# EAGLE board MineralFire (EAGLE 8.7.0)
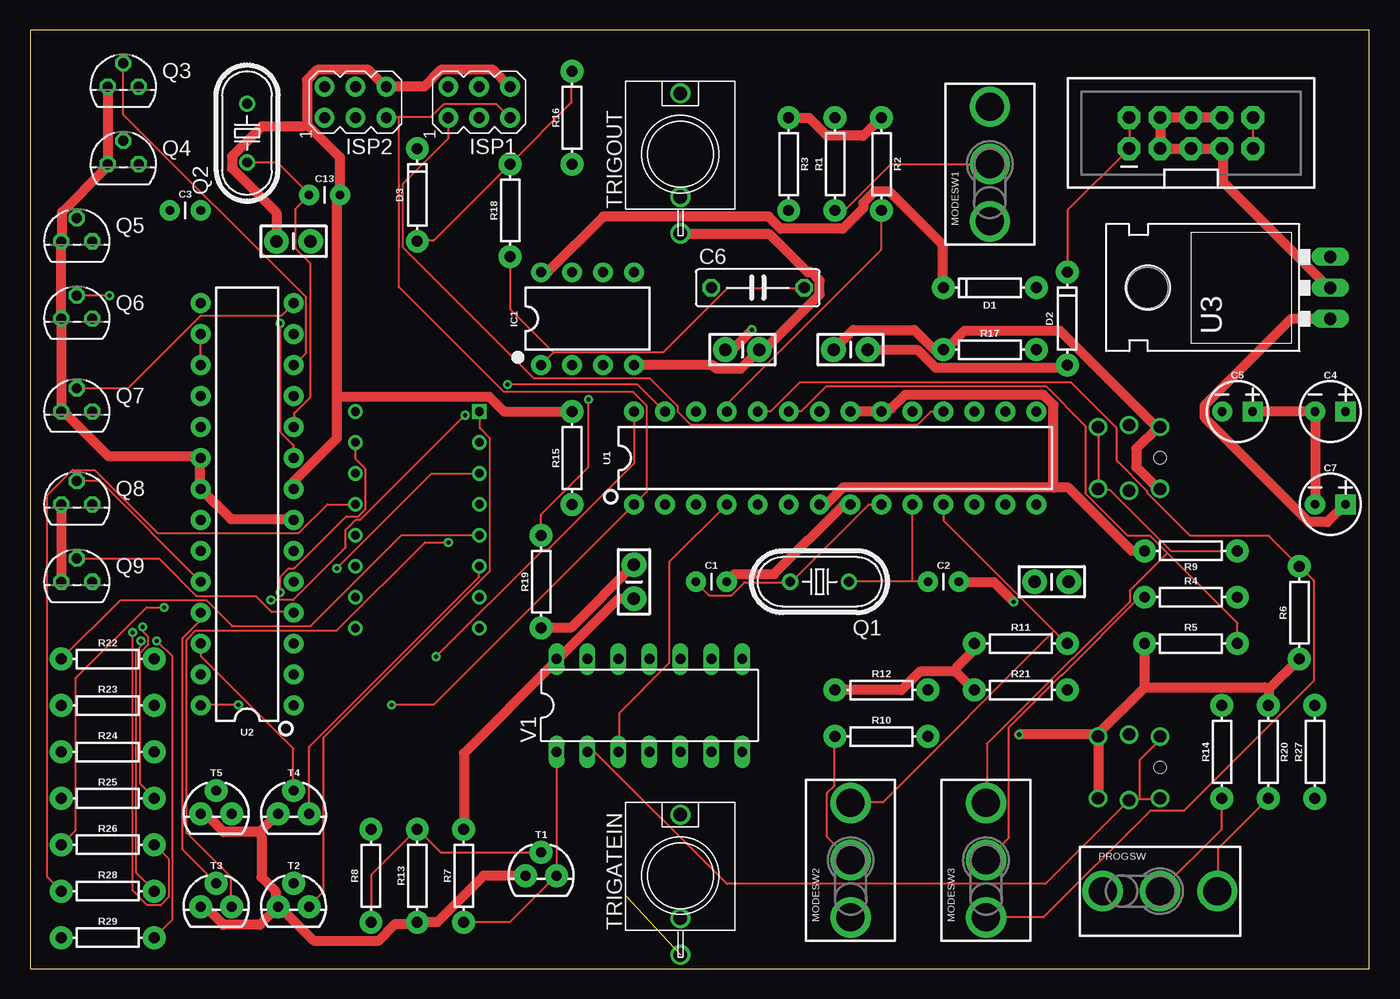
[diagram p0: board, top side]
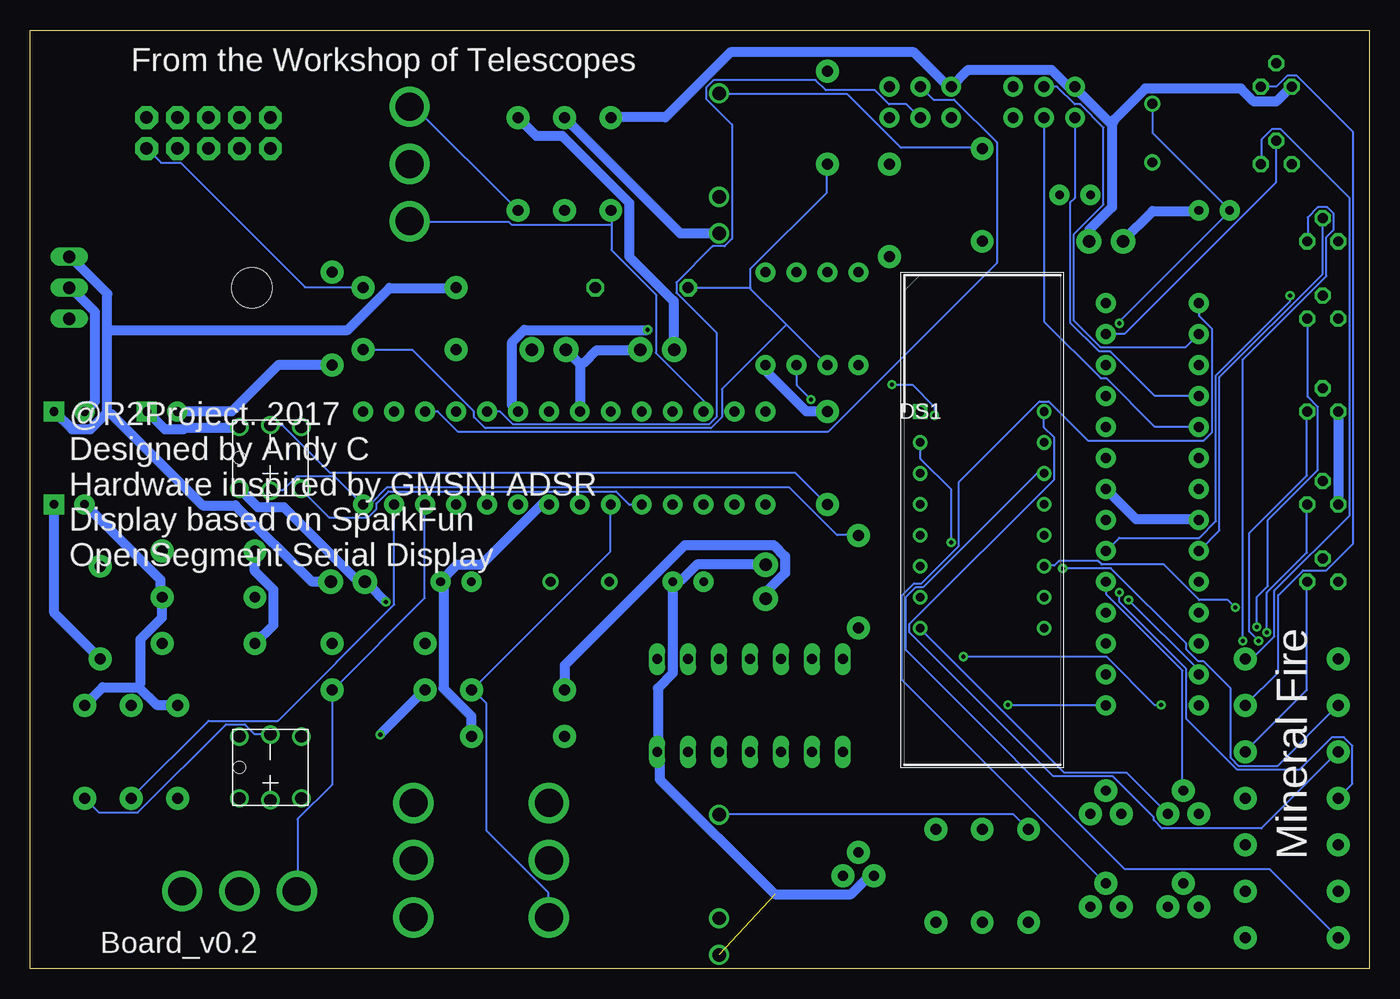
[diagram p1: board, bottom side, seen from below]

Size 109.86 x 77 mm. Coordinates in mm from the lower left corner, seen from the top.
Outline: 0,0 109.86,0 109.86,77 0,77 0,0
Copper layers (1*16): Top 0.035mm / dielectric 1.5mm / Bottom 0.035mm
Design rules "default": minimum track width 6mil, minimum drill 0.35mm, track to track 6mil, track to pad 6mil, pad to pad 6mil, via to via 6mil, smd to smd 6mil, copper to edge 40mil, drill to drill 6mil, minimum pad ring 10mil, minimum via ring 8mil, stop-mask expansion 4mil, vias tented up to drill 0mil, thermal gap 10mil
Net classes: 1 Power: width 0.8 mm

## Footprints (pad centres in the part's own frame; a part is rotated, then mirrored left to right if it is on the bottom)
PB6149L = drill 1: 1 2.54,-2.54; 2 2.54,2.54; 3 -2.54,-2.54; 4 -2.54,2.54; A 0,-2.7; K 0,2.7 | hole 1: -2.54,0
CAP-PTH-2.54 = drill 0.7 pad 1.651: 1 -1.27,0; 2 1.27,0
CPOL-RADIAL-2.5MM-5MM = drill 0.7 pad 1.651 square: 1 1.25,0 | drill 0.7 pad 1.651: 2 -1.25,0
C075-032X103 = drill 0.914 octagon: 1 -3.81,0; 2 3.81,0
CAP-PTH-SMALL-KIT = drill 1.016 pad 2.032: 1 -1.397,0; 2 1.397,0
DIODE-1N4148 = drill 0.9 pad 1.88: A -3.81,0; C 3.81,0
DIPS1016W50P254L4020H700Q16N = drill 0.7 pad 1.1 square: 1 0,0 | drill 0.7 pad 1.1: 2 0,-2.54; 3 0,-5.08; 4 0,-7.62; 5 0,-10.16; 6 0,-12.7; 7 0,-15.24; 8 0,-17.78; 9 10.16,-17.78; 10 10.16,-15.24; 11 10.16,-12.7; 12 10.16,-10.16; 13 10.16,-7.62; 14 10.16,-5.08; 15 10.16,-2.54; 16 10.16,0
DIP08 = drill 0.813 pad 1.626: 1 -3.81,-3.81; 2 -1.27,-3.81; 3 1.27,-3.81; 4 3.81,-3.81; 5 3.81,3.81; 6 1.27,3.81; 7 -1.27,3.81; 8 -3.81,3.81
AVRISP = drill 0.9 pad 1.626: 1 -1.27,2.54; 2 1.27,2.54; 3 -1.27,0; 4 1.27,0; 5 -1.27,-2.54; 6 1.27,-2.54
TOGGLE_ON_OFF_ON = drill 2.3: 1 -4.7,0; 2 0,0; 3 4.7,0
2X5-SHROUDED = drill 1.016 pad 1.88 octagon: 1 -1.27,5.08; 2 1.27,5.08; 3 -1.27,2.54; 4 1.27,2.54; 5 -1.27,0; 6 1.27,0; 7 -1.27,-2.54; 8 1.27,-2.54; 9 -1.27,-5.08; 10 1.27,-5.08
HC49U70 = drill 0.813: 1 -2.413,0; 2 2.413,0
TO92 = drill 0.813 octagon: 1 1.27,0; 2 0,1.905; 3 -1.27,0
AXIAL-0.3 = drill 0.9 pad 1.88: P$1 -3.81,0; P$2 3.81,0
AXIAL-0.3EZ = drill 0.9 pad 1.88: P$1 -3.81,0; P$2 3.81,0
TO-92 = drill 0.813 pad 1.88: 1 -1.27,0; 2 0,1.905; 3 1.27,0
S_JACK = drill 1.1: GND 0,-6.5; NORM 0,-3.5; TIP 0,5
DIP28 = drill 0.813 pad 1.626: 1 -16.51,-3.81; 2 -13.97,-3.81; 3 -11.43,-3.81; 4 -8.89,-3.81; 5 -6.35,-3.81; 6 -3.81,-3.81; 7 -1.27,-3.81; 8 1.27,-3.81; 9 3.81,-3.81; 10 6.35,-3.81; 11 8.89,-3.81; 12 11.43,-3.81; 13 13.97,-3.81; 14 16.51,-3.81; 15 16.51,3.81; 16 13.97,3.81; 17 11.43,3.81; 18 8.89,3.81; 19 6.35,3.81; 20 3.81,3.81; 21 1.27,3.81; 22 -1.27,3.81; 23 -3.81,3.81; 24 -6.35,3.81; 25 -8.89,3.81; 26 -11.43,3.81; 27 -13.97,3.81; 28 -16.51,3.81
TO-220-ALT = drill 1.016 long: GND 0,-3.81; IN -2.54,-3.81; OUT 2.54,-3.81 | hole 3.302: 0,11.176
DIL14 = drill 0.813 long: 1 -7.62,-3.81; 2 -5.08,-3.81; 3 -2.54,-3.81; 4 0,-3.81; 5 2.54,-3.81; 6 5.08,-3.81; 7 7.62,-3.81; 8 7.62,3.81; 9 5.08,3.81; 10 2.54,3.81; 11 0,3.81; 12 -2.54,3.81; 13 -5.08,3.81; 14 -7.62,3.81

## Placement (x,y rotation side)
BUT  PB6149L-5  [PB6149L]  90.17,41.91 0 bottom
BUT1  PB6149L-5  [PB6149L]  90.17,16.51 0 bottom
C1  22pF  [CAP-PTH-2.54]  55.88,31.75 0 top
C2  22pF  [CAP-PTH-2.54]  74.93,31.75 0 top
C3  22pF  [CAP-PTH-2.54]  12.7,62.23 0 top
C4  10uF  [CPOL-RADIAL-2.5MM-5MM]  106.68,45.72 0 top
C5  10uF  [CPOL-RADIAL-2.5MM-5MM]  99.06,45.72 0 top
C6  100pf  [C075-032X103]  59.69,55.88 0 top
C7  10uF  [CPOL-RADIAL-2.5MM-5MM]  106.68,38.1 0 top
C8  0.1uF  [CAP-PTH-SMALL-KIT]  83.82,31.75 180 top
C9  0.1uF  [CAP-PTH-SMALL-KIT]  67.31,50.8 0 top
C10  0.1uF  [CAP-PTH-SMALL-KIT]  58.42,50.8 0 top
C11  0.1uF  [CAP-PTH-SMALL-KIT]  49.53,31.75 90 top
C12  0.1uF  [CAP-PTH-SMALL-KIT]  21.59,59.69 180 top
C13  22pF  [CAP-PTH-2.54]  24.13,63.5 0 top
D1  200mA/100V/1V  [DIODE-1N4148]  78.74,55.88 180 top
D2  200mA/100V/1V  [DIODE-1N4148]  85.09,53.34 90 top
D3  200mA/100V/1V  [DIODE-1N4148]  31.75,63.5 90 top
DS1  TDCG1060M  [DIPS1016W50P254L4020H700Q16N]  36.83,45.72 0 bottom
IC1  LM358  [DIP08]  45.72,53.34 0 top
ISP1  AVRISP-6  [AVRISP]  36.83,71.12 90 top
ISP2  AVRISP-6  [AVRISP]  26.67,71.12 90 top
MODESW1  [TOGGLE_ON_OFF_ON]  78.74,66.04 90 top
MODESW2  [TOGGLE_ON_OFF_ON]  67.31,8.89 90 top
MODESW3  [TOGGLE_ON_OFF_ON]  78.42,8.89 90 top
POWER  M05X2SHD  [2X5-SHROUDED]  95.25,68.58 90 top
PROGSW  [TOGGLE_ON_OFF_ON]  92.71,6.35 0 top
Q1  20MHz  [HC49U70]  64.77,31.75 180 top
Q2  20MHz  [HC49U70]  17.78,68.58 90 top
Q3  2N3906  [TO92]  7.62,72.39 0 top
Q4  2N3906  [TO92]  7.62,66.04 0 top
Q5  2N3906  [TO92]  3.81,59.69 0 top
Q6  2N3906  [TO92]  3.81,53.34 0 top
Q7  2N3906  [TO92]  3.81,45.72 0 top
Q8  2N3906  [TO92]  3.81,38.1 0 top
Q9  2N3906  [TO92]  3.81,31.75 0 top
R1  1k  [AXIAL-0.3]  66.04,66.04 90 top
R2  100k  [AXIAL-0.3]  69.85,66.04 270 top
R3  100k  [AXIAL-0.3]  62.23,66.04 270 top
R4  1k  [AXIAL-0.3]  95.25,30.48 0 top
R5  100k  [AXIAL-0.3]  95.25,26.67 0 top
R6  100k  [AXIAL-0.3]  104.14,29.21 90 top
R7  10k  [AXIAL-0.3]  35.56,7.62 90 top
R8  100k  [AXIAL-0.3]  27.94,7.62 90 top
R9  10k  [AXIAL-0.3]  95.25,34.29 180 top
R10  1k  [AXIAL-0.3]  69.85,19.05 0 top
R11  100k  [AXIAL-0.3]  81.28,26.67 0 top
R12  100k  [AXIAL-0.3]  69.85,22.86 0 top
R13  1M  [AXIAL-0.3]  31.75,7.62 90 top
R14  1k  [AXIAL-0.3]  97.79,17.78 90 top
R15  330  [AXIAL-0.3]  44.45,41.91 90 top
R16  100k  [AXIAL-0.3]  44.45,69.85 90 top
R17  100k  [AXIAL-0.3]  78.74,50.8 0 top
R18  1k  [AXIAL-0.3]  39.37,62.23 90 top
R19  100k  [AXIAL-0.3]  41.91,31.75 90 top
R20  100k  [AXIAL-0.3]  101.6,17.78 270 top
R21  100k  [AXIAL-0.3]  81.28,22.86 0 top
R22  100  [AXIAL-0.3EZ]  6.35,25.4 0 top
R23  100  [AXIAL-0.3EZ]  6.35,21.59 0 top
R24  100  [AXIAL-0.3EZ]  6.35,17.78 0 top
R25  100  [AXIAL-0.3EZ]  6.35,13.97 0 top
R26  100  [AXIAL-0.3EZ]  6.35,10.16 0 top
R27  150  [AXIAL-0.3]  105.41,17.78 90 top
R28  100  [AXIAL-0.3EZ]  6.35,6.35 0 top
R29  100  [AXIAL-0.3EZ]  6.35,2.54 0 top
T1  200mA/40V  [TO-92]  41.91,7.62 0 top
T2  200mA/40V  [TO-92]  21.59,5.08 0 top
T3  200mA/40V  [TO-92]  15.24,5.08 0 top
T4  200mA/40V  [TO-92]  21.59,12.7 0 top
T5  200mA/40V  [TO-92]  15.24,12.7 0 top
TRIGATEIN  [S_JACK]  53.34,7.62 0 top
TRIGOUT  [S_JACK]  53.34,66.84 0 top
U1  328P  [DIP28]  66.04,41.91 0 top
U2  328P  [DIP28]  17.78,38.1 90 top
U3  7805  [TO-220-ALT]  102.87,55.88 90 top
V1  7432N  [DIL14]  50.8,21.59 0 top

## Library data of the parts
BUT BUT1 MODESW1-MODESW3 PROGSW TRIGATEIN TRIGOUT = INSTRUO
C1-C3 C13 = SparkFun-Capacitors; PROD_ID: CAP-09128
C4 C5 C7 = SparkFun-Capacitors; PROD_ID: CAP-08440
C6 = rcl
C8-C12 = SparkFun-Capacitors; PROD_ID: CAP-08370
D1-D3 = SparkFun-DiscreteSemi; PROD_ID: DIO-08378
DS1 = TDCG1060M; DESCRIPTION: VISHAY - TDCG1060M - DISPLAY, SEVEN SEGMENT, 10MM, GREEN; HEIGHT: 7mm; MANUFACTURER_NAME: Vishay; MANUFACTURER_PART_NUMBER: TDCG1060M; RS_PART_NUMBER: 8187530P; SUPPLIER_NAME: RS
IC1 = SparkFun-IC-Amplifiers; PROD_ID: IC-09172
ISP1 ISP2 = adafruit
POWER = SparkFun-Connectors
Q1 Q2 = adafruit; OC_FARNELL: unknown; OC_NEWARK: unknown
Q3-Q9 = transistor-pnp
R1 R4 R10 R14 R18 = SparkFun-Resistors; PROD_ID: RES-08380
R2 R3 R5 R6 R8 R11 R12 R16 R17 R19-R21 R27 = SparkFun-Resistors; PROD_ID: RES-10686
R7 = SparkFun-Resistors; PROD_ID: RES-09435
R9 = SparkFun-Resistors; PROD_ID: RES-12183
R13 = SparkFun-Resistors; PROD_ID: RES-09329
R15 = SparkFun-Resistors; PROD_ID: RES-8371
R22-R26 R28 R29 = SparkFun-Resistors; PROD_ID: RES-12181
T1-T5 = SparkFun-DiscreteSemi; PROD_ID: TRANS-08447
U1 U2 = SparkFun-IC-Microcontroller; PROD_ID: IC-09136
U3 = SparkFun-IC-Power; PROD_ID: VREG-08450; SF_ID: COM-00107
V1 = 74ttl-din

## Nets
+5V [Power]: BUT1.1 BUT1.2 C7.1 C10.1 C11.1 C12.1 ISP1.2 ISP2.2 Q3.3 Q4.3 Q5.3 Q6.3 Q7.3 Q8.3 Q9.3 R2.P$1 R3.P$1 R5.P$1 R6.P$1 R7.P$2 R9.P$2 R11.P$1 R12.P$1 R20.P$1 R21.P$1 U1.7 U1.20 U1.21 U2.7 U2.20 U2.21 U3.IN V1.14
+12V [Power]: C4.1 C8.1 D1.C IC1.8 U3.OUT
-12V [Power]: C5.2 C9.2 D2.A
AN-A: DS1.14 R29.P$1
AN-B: DS1.16 R24.P$1
AN-C: DS1.13 R28.P$1
AN-D: DS1.3 R23.P$1
AN-E: DS1.5 R22.P$1
AN-F: DS1.11 R26.P$1
AN-G: DS1.15 R25.P$1
B_TRIG: BUT.1 BUT.2 R9.P$1 U1.5
C-DIG1: T2.2 U2.15
C-DIG2: T3.2 U2.25
C-DIG3: T4.2 U2.26
C-DIG4: T5.2 U2.5
C-SEGA: Q5.2 U2.23
C-SEGB: Q9.2 U2.4
C-SEGC: Q7.2 U2.14
C-SEGD: Q3.2 U2.12
C-SEGDP: U2.11
C-SEGE: Q4.2 U2.13
C-SEGF: Q8.2 U2.24
C-SEGG: Q6.2 U2.6
CS: U1.16
D1: DS1.1 T2.3
D2: DS1.2 T3.3
D3: DS1.6 T4.3
D4: DS1.8 T5.3
GND [Power]: BUT.3 BUT.4 C1.2 C2.2 C3.2 C4.2 C5.1 C7.2 C8.2 C9.1 C10.2 C11.2 C12.2 C13.2 IC1.4 ISP1.6 ISP2.6 POWER.3 POWER.4 POWER.5 POWER.6 POWER.7 POWER.8 R1.P$2 R4.P$2 R10.P$2 R13.P$1 R14.P$2 R15.P$2 R17.P$1 R19.P$1 R27.P$2 T1.1 T2.1 T3.1 T4.1 T5.1 TRIGATEIN.GND TRIGOUT.GND U1.8 U1.22 U2.8 U2.22 U3.GND V1.7
LBUTTON: BUT1.3 BUT1.4 BUT1.A V1.2
LTRIG: R7.P$1 T1.3 V1.1
MISO: ISP1.1 U1.18
MISO2: ISP2.1 U2.18
MOSI: ISP1.4 U1.17
MOSI2: ISP2.4 U2.16 U2.17
N$1: C1.1 Q1.2 U1.9
N$2: C2.1 Q1.1 U1.10
N$3: MODESW1.2 R1.P$1
N$4: MODESW3.2 R4.P$1
N$5: Q4.1 R22.P$2
N$6: PROGSW.2 R14.P$1
N$7: C3.1 Q2.2 U2.9
N$8: C13.1 Q2.1 U2.10
N$9: D1.A POWER.9 POWER.10
N$10: D2.C POWER.1 POWER.2
N$11: Q3.1 R23.P$2
N$12: MODESW2.2 R10.P$1
N$13: Q9.1 R24.P$2
N$14: Q8.1 R26.P$2
N$15: R8.P$1 R13.P$2 T1.2
N$16: Q7.1 R28.P$2
N$17: Q6.1 R25.P$2
N$18: R8.P$2 TRIGATEIN.TIP
N$19: BUT1.K R27.P$1
N$20: Q5.1 R29.P$2
N$31: BUT.K R15.P$1
N$32: C6.1 IC1.2 R16.P$1 R17.P$2
N$33: C6.2 IC1.1 R18.P$1
N$34: D3.A R16.P$2 R18.P$2
N$74: D3.C TRIGOUT.TIP
RST: ISP1.5 ISP2.5 U1.1 U2.1
SCK: ISP1.3 U1.19
SCK2: ISP2.3 U2.19
SCL: U1.28 U2.28
SDA: U1.27 U2.27
T1: MODESW2.3 R11.P$2 U1.11
T2: MODESW2.1 R12.P$2 U1.6
T3: MODESW1.3 R2.P$2 U1.25
T4: MODESW1.1 R3.P$2 U1.26
T5: MODESW3.3 R5.P$2 U1.23
T6: MODESW3.1 R6.P$2 U1.24
T7: PROGSW.1 R21.P$2 U1.12
T8: PROGSW.3 R20.P$2 U1.13
TRIG: U1.4 V1.3
TRIGO: BUT.A IC1.3 R19.P$2 U1.14

## Tracks (layer width: path | path; a pad name or v marks a point on that pad's centre or on a via)
+5V  (via drill 0.35)
  Top 0.8: R2.P$1 68.35,68.35 65.38,68.35 63.93,69.8 62.26,69.8 R3.P$1 | U2.7 21.57,36.88 16.46,36.88 U2.21 13.95,39.7 13.95,41.91 U2.20 13.56,42.06 6.4,42.06 2.9,45.57 Q7.3 2.52,45.72 2.52,53.34 Q6.3 2.52,53.72 2.52,59.66 Q5.3 2.59,60.05 2.59,62.1 6.17,65.68 Q4.3 6.33,66.06 6.33,72.39 Q3.3 | Q9.3 2.52,31.77 2.52,38.1 Q8.3 | U1.21 U1.20 70.18,45.95 70.64,45.95 71.78,47.09 83.13,47.09 83.97,46.25 83.97,39.47 | U1.7 65.3,38.1 66.67,39.47 83.97,39.47 | 83.97,39.47 85.19,39.47 90.37,34.29 R9.P$2 | C11.1 49.53,30.33 48.23,30.33 43.36,25.45 43.2,25.45 V1.14 42.98,25.07 35.59,17.68 35.59,11.43 R7.P$2 | U3.IN 103.48,53.34 96.39,46.25 96.39,45.19 104.93,36.65 106.45,36.65 107.9,38.1 C7.1 | R12.P$1 71.48,22.86 73,24.38 75.89,24.38 | 75.89,24.38 77.42,22.86 R21.P$1 | R11.P$1 77.42,26.67 77.42,26.14 76.05,24.77 75.89,24.38 | 101.65,22.94 101.65,21.64 R20.P$1 | 101.65,22.94 104.09,25.38 R6.P$1 | BUT1.2 BUT1.1 | 91.44,23.09 R5.P$1 | 91.44,23.09 87.78,19.43 BUT1.2 | 91.44,23.09 101.27,23.09 101.65,22.94 | v81.15,19.2 87.25,19.2 BUT1.2 | v59.21,52.43 57.61,50.83 57.07,50.83 C10.1
  Bottom 0.8: R2.P$1 68.35,68.35 66.22,68.35 60.73,62.87 60.73,58.45 57.07,54.79 57.07,50.83 C10.1 | 21.11,69.27 21.11,62.48 22.94,60.66 22.94,59.74 C12.1 | 21.11,69.27 23.93,72.08 ISP2.2 24.69,72.39 26.06,73.76 32.92,73.76 ISP1.2 34.67,72.54 37.34,75.21 52.43,75.21 57.76,69.88 62.18,69.88 R3.P$1 | Q8.3 2.52,38.1 2.52,45.72 Q7.3 | 21.11,69.27 20.95,69.65 18.36,72.24 10.52,72.24 9.45,71.17 7.62,71.17 6.4,72.39 Q3.3 | v81.15,19.2 77.5,22.86 R21.P$1 | C7.1 107.9,38.1 107.9,29.18 104.17,25.45 R6.P$1 | C11.1 49.53,30.86 47.93,32.46 47.93,33.83 48.84,34.75 56.16,34.75 65.99,24.92 65.99,22.86 R12.P$1 | R9.P$2 91.44,32.61 89.92,31.09 89.92,28.19 R5.P$1 | v59.21,52.43 69.34,52.43 70.33,51.44 70.33,46.18 69.88,45.72 U1.20
+12V
  Top 0.8: IC1.8 42.44,57.15 47.02,61.72 60.58,61.72 61.57,60.73 66.67,60.73 68.35,62.41 68.35,62.87 69.27,63.78 70.48,63.78 74.91,59.36 74.91,55.93 D1.C
  Bottom 0.8: 103.56,45.64 103.56,52.43 | 103.56,52.43 103.56,55.4 106.53,58.37 106.68,58.37 U3.OUT | 103.56,45.64 104.93,44.27 106.45,44.27 107.9,45.72 C4.1 | C8.1 85.27,31.77 86.79,31.77 93.04,38.02 95.71,38.02 103.17,45.49 103.56,45.64 | 103.56,52.43 83.82,52.43 80.39,55.85 74.98,55.85 D1.C
-12V
  Top 0.8: C9.2 68.73,50.75 72.85,50.75 74.3,49.3 84.81,49.3 85.04,49.53 D2.A
  Bottom 0.8: C5.2 93.34,45.72 89.53,49.53 D2.A
AN-A
  Bottom 0.152: R29.P$1 8.15,8.15 20.04,8.15 38.02,26.14 38.02,30.48 37.19,31.32 36.58,31.32 27.28,40.62 26.67,40.62 DS1.14
AN-B
  Bottom 0.152: DS1.16 26.67,44.42 25.83,43.59 25.83,40.16 37.72,28.27 37.72,27.58 25.91,15.77 21.03,15.77 17.68,12.42 17.68,12.19 16.99,11.51 8.84,11.51 2.59,17.75 R24.P$1
AN-C
  Top 0.152: DS1.13 24.38,38.1 22.02,35.74 10.44,35.74 5.26,40.92 3.43,40.92 1.37,38.86 1.37,7.54 2.52,6.4 R28.P$1
AN-D  (via drill 0.35)
  Top 0.152: v25.15,32.84 32.92,40.62 36.8,40.62 DS1.3
  Bottom 0.152: v25.15,32.84 21.18,32.84 15.01,26.67 15.01,26.21 14.02,25.22 13.56,25.22 11.35,23.01 11.35,17.3 10.67,16.61 7.54,16.61 2.59,21.57 R23.P$1
AN-E
  Top 0.152: R22.P$1 7.39,30.25 14.4,30.25 16.54,28.12 23.01,28.12 30.48,35.59 36.8,35.59 DS1.5
AN-F  (via drill 0.35)
  Top 0.152: v10.97,29.64 9.53,29.64 3.73,23.85 3.73,11.35 R26.P$1
  Bottom 0.152: v10.97,29.64 11.58,30.25 13.95,30.25 16.84,33.15 21.95,33.15 22.25,33.45 25.45,33.45 25.83,33.07 26.67,33.07 DS1.11
AN-G  (via drill 0.35)
  Top 0.152: DS1.15 26.67,41.83 27.51,41 27.51,37.72 26.9,37.11 25.91,37.11 21.64,32.84 21.18,32.84 20.5,32.16 v20.5,30.86
  Bottom 0.152: v20.5,30.86 20.5,30.1 15.01,24.61 15.01,20.5 10.82,16.31 5.71,16.31 3.05,18.97 2.06,18.97 1.37,18.29 1.37,15.16 2.52,14.02 R25.P$1
B_TRIG
  Top 0.152: BUT.2 BUT.1 87.63,39.32 88.54,39.32 93.57,34.29 R9.P$1
  Bottom 0.152: U1.5 60.73,38.1 61.8,39.17 80.47,39.17 81.46,38.18 81.46,37.72 82.14,37.03 85.34,37.03 87.63,39.32 BUT.1
C-DIG1
  Bottom 0.152: U2.15 13.95,54.56 13.95,53.57 12.88,52.5 12.88,44.04 13.56,43.36 23.09,43.36 26.29,46.56 27.05,46.56 33.68,39.93 33.68,34.67 36.73,31.62 37.34,31.62 38.33,30.63 38.33,23.7 21.64,7.01 T2.2
C-DIG2
  Top 0.152: U2.25 13.95,29.18 13.95,28.57 12.5,27.13 12.5,9.75 15.24,7.01 T3.2
C-DIG3
  Top 0.152: U2.26 14.02,26.67 14.02,25.6 21.57,18.06 21.57,14.63 T4.2
C-DIG4
  Bottom 0.152: U2.5 21.57,31.7 21.57,30.71 15.32,24.46 15.32,14.71 15.24,14.63 T5.2
C-SEGA
  Bottom 0.152: Q5.2 3.81,57 12.27,48.54 12.27,35.97 13.95,34.29 U2.23
C-SEGB
  Top 0.152: Q9.2 3.81,33.6 10.59,33.6 13.64,30.56 18.52,30.56 19.81,29.26 21.57,29.26 U2.4
C-SEGC
  Top 0.152: Q7.2 8,47.62 13.95,53.57 20.57,53.57 21.57,54.56 U2.14
C-SEGD
  Top 0.152: Q3.2 7.62,70.1 22.63,55.09 22.63,50.52 21.64,49.53 U2.12
C-SEGE
  Bottom 0.152: Q4.2 7.62,64.54 20.04,52.12 21.57,52.12 U2.13
C-SEGF
  Top 0.152: Q8.2 5.71,40.01 U2.24
C-SEGG  (via drill 0.35)
  Top 0.152: v6.48,55.24 Q6.2
  Bottom 0.152: v6.48,55.24 6.48,54.79 12.57,48.69 12.57,36.73 13.95,35.36 20.5,35.36 21.57,34.29 U2.6
D1
  Top 0.152: DS1.1 36.88,45.72 36.88,44.35 37.72,43.51 37.72,32.61 24.08,18.97 24.08,6.33 22.86,5.11 T2.3
D2  (via drill 0.35)
  Top 0.152: v34.29,34.98 32.38,34.98 25.15,27.74 13.56,27.74 12.8,26.98 12.8,11.12 16.46,7.47 16.46,5.11 T3.3
  Bottom 0.152: v34.29,34.98 34.29,39.32 36.8,41.83 36.8,43.13 DS1.2
D3
  Top 0.152: T4.3 22.86,18.21 36.8,32.16 36.8,32.99 DS1.6
D4
  Bottom 0.152: T5.3 19.89,16.08 24.99,16.08 36.8,27.89 DS1.8
GND  (via drill 0.35)  (1 unrouted)
  Top 0.8: T1.1 37.19,7.62 33.38,3.81 R13.P$1 31.39,3.66 29.95,3.66 28.57,2.29 23.24,2.29 20.65,4.88 T2.1 | T2.1 18.82,3.58 15.85,3.58 14.4,5.03 14.02,5.03 T3.1 | 18.82,11.2 15.85,11.2 14.4,12.65 14.02,12.65 T5.1 | T4.1 18.82,11.2 | T2.1 20.12,5.41 20.12,6.33 18.97,7.47 18.97,10.82 18.82,11.2 | C11.2 44.35,27.96 41.91,27.96 R19.P$1 | U1.8 66.75,38.1 61.04,32.38 57.76,32.38 57.15,31.77 C1.2 | BUT.3 92.66,39.4 92.51,39.4 90.75,41.15 90.75,42.67 92.51,44.42 92.66,44.42 BUT.4 92.2,44.65 84.51,52.35 76.66,52.35 75.29,50.98 R17.P$1 74.91,50.83 74.14,50.83 72.54,52.43 67.51,52.43 65.91,50.83 C9.1 | POWER.8 97.77,69.88 95.63,69.88 POWER.6 95.25,69.88 93.12,69.88 POWER.4 92.73,69.8 92.73,67.36 POWER.3 93.12,67.28 95.25,67.28 POWER.5 95.63,67.28 97.77,67.28 POWER.7 97.92,66.9 97.92,64.54 106.53,55.93 106.68,55.93 U3.GND | C7.2 105.46,38.1 105.46,45.72 C4.2 C5.1 | IC1.4 56.01,49.53 56.31,49.23 58.29,49.23 59.82,50.75 C10.2 60.2,50.98 60.43,50.98 64.77,55.32 64.77,56.46 64.08,57.15 63.78,57.15 60.66,60.27 53.34,60.27 TRIGOUT.GND | ISP1.6 39.32,72.39 37.95,73.76 33.68,73.76 32.31,72.39 ISP2.6 28.88,72.62 27.74,73.76 23.55,73.76 22.71,72.92 22.71,69.27 | 22.71,69.27 25.38,66.6 25.38,63.55 C13.2 25.15,63.17 25.15,46.94 | C12.2 20.19,62.03 16.54,65.68 16.54,66.67 18.97,69.11 22.33,69.11 22.71,69.27 | 25.15,46.94 25.15,43.51 21.64,40.01 21.64,39.4 U2.8 | R15.P$2 38.86,45.72 37.64,46.94 25.15,46.94 | v80.7,30.1 79.1,31.7 76.2,31.7 C2.2
  Bottom 0.8: U1.8 67.89,38.1 72.85,33.15 74.83,33.15 76.2,31.77 C2.2 75.97,31.47 75.97,23.01 73.69,20.73 73.69,19.05 R10.P$2 | C11.2 55.17,33.15 56.39,31.93 56.77,31.93 C1.2 57.15,24.23 58.37,23.01 58.37,17.83 V1.7 58.22,17.45 58.22,15.54 48.77,6.1 42.52,6.1 41,7.62 T1.1 | BUT.3 91.21,37.87 89.08,37.87 82.98,31.77 82.45,31.77 C8.2 82.14,31.55 v80.7,30.1 | 100.97,23.09 99.52,21.64 97.84,21.64 R14.P$2 | 100.97,23.09 103.94,23.09 105.39,21.64 R27.P$2 | 100.97,23.09 100.81,23.47 100.81,27.05 99.06,28.8 R4.P$2 99.21,30.86 99.21,31.93 105.39,38.1 C7.2 | U3.GND 106.68,55.85 106.53,55.85 104.55,53.87 104.55,46.56 105.39,45.72 C4.2 | BUT.4 92.73,44.42 97.16,44.42 97.31,44.27 98.83,44.27 100.28,45.72 C5.1 | R1.P$2 56.54,60.35 TRIGOUT.GND | IC1.4 49.53,49.07 46.18,45.72 R15.P$2 | 64.77,49.61 U1.22 | 64.77,49.61 65.91,50.75 C9.1 | C10.2 59.82,50.75 63.4,50.75 64.39,49.76 64.77,49.61 | U2.22 14.02,36.88 19.13,36.88 21.57,39.32 U2.8 | C3.2 14.02,62.18 17.75,62.18 20.19,59.74 C12.2
LBUTTON
  Top 0.152: V1.2 45.72,17.75 46.33,17.75 57.15,6.93 83.29,6.93 90.14,13.79 BUT1.A 90.22,13.87 90.3,13.95 91.06,13.95 | 91.06,13.95 92.66,13.95 BUT1.3 | 91.06,13.95 91.06,17.14 92.66,18.75 92.66,19.05 BUT1.4
LTRIG
  Top 0.152: V1.1 43.2,17.75 43.2,7.62 T1.3 43.13,7.62 39.32,3.81 R7.P$1
MISO
  Top 0.152: U1.18 73.91,45.72 72.85,44.65 54.18,44.65 53.11,45.72 53.11,46.18 50.83,48.46 41.3,48.46 30.56,59.21 30.56,64.39 34.29,68.12 ISP1.1
MISO2
  Bottom 0.152: U2.18 14.02,47.02 17.6,47.02 21.26,50.67 22.17,50.67 24.54,53.03 24.54,62.87 24.16,63.25 24.16,69.8 ISP2.1
MOSI
  Bottom 0.152: U1.17 76.43,45.72 74.75,44.04 44.42,44.04 30.56,57.91 30.56,67.82 34.06,71.32 35.74,71.32 36.8,72.39 ISP1.4
MOSI2
  Top 0.152: U2.17 13.95,49.53 13.95,52.05 U2.16
  Bottom 0.152: ISP2.4 25.6,72.39 24.16,70.94 23.7,70.94 21.79,69.04 21.79,62.71 24.23,60.27 24.23,53.19 22.02,50.98 15.09,50.98 14.02,52.05 U2.16
N$1
  Top 0.152: C1.1 54.63,31.7 55.7,30.63 57.53,30.63 58.6,31.7 62.33,31.7 Q1.2 62.41,31.7 68.81,38.1 U1.9
N$2
  Top 0.152: 72.39,31.77 73.61,31.77 C2.1 | 72.39,31.77 67.21,31.77 Q1.1 | 72.39,31.77 U1.10
N$3
  Top 0.152: R1.P$1 66.06,62.26 66.83,62.26 70.56,65.99 78.72,65.99 MODESW1.2
N$4
  Top 0.152: R4.P$1 91.06,30.48 84.66,24.08 84.58,24.08 80.31,19.81 80.31,10.74 78.49,8.91 MODESW3.2
N$5
  Bottom 0.152: Q4.1 8.84,66.06 8.84,68.05 8,68.89 7.24,68.89 1.6,63.25 1.6,37.19 7.77,31.01 7.77,27.28 9.6,25.45 10.13,25.45 R22.P$2
N$6
  Top 0.152: R14.P$1 97.77,13.95 97.77,11.43 92.73,6.4 PROGSW.2
N$7  (via drill 0.35)
  Top 0.152: v20.5,52.96 20.5,44.04 21.57,42.98 21.57,41.91 U2.9
  Bottom 0.152: Q2.2 17.75,70.94 17.75,68.58 11.43,62.26 C3.1 11.43,62.18 20.5,53.11 v20.5,52.96
N$8
  Top 0.152: Q2.1 17.83,66.14 20.27,66.14 22.86,63.55 C13.1 22.86,63.48 21.72,62.33 21.72,59.13 22.94,57.91 22.94,46.86 21.64,45.57 21.64,44.5 U2.10
N$9
  Top 0.152: POWER.10 100.36,69.8 100.36,67.36 POWER.9
  Bottom 0.152: D1.A 82.6,55.93 87.33,55.93 97.54,66.14 99.14,66.14 100.28,67.28 POWER.9
N$10
  Top 0.152: D2.C 85.11,57.15 85.11,62.26 POWER.1 90.22,67.36 90.22,69.8 POWER.2
N$11
  Bottom 0.152: Q3.1 7.62,72.39 6.71,73.3 5.94,73.3 1.29,68.66 1.29,34.9 3.5,32.69 5.41,32.69 7.47,30.63 7.47,24.31 10.13,21.64 R23.P$2
N$12
  Top 0.152: MODESW2.2 65.38,10.82 65.38,14.4 65.99,15.01 65.99,19.05 R10.P$1
N$13
  Bottom 0.152: Q9.1 5.11,31.7 5.11,22.86 10.13,17.83 R24.P$2
N$14  (via drill 0.35)
  Top 0.152: v8.38,27.58 8.38,6.4 9.6,5.18 10.67,5.18 11.35,5.87 11.35,8.99 10.21,10.13 R26.P$2
  Bottom 0.152: v8.38,27.58 8.38,30.86 5.11,34.14 5.11,38.1 Q8.1
N$15
  Top 0.152: R8.P$1 27.96,3.81 27.96,7.7 31.7,11.43 R13.P$2 31.77,11.43 33.68,9.53 T1.2
N$16  (via drill 0.35)
  Top 0.152: v9.07,26.9 9.07,26.44 8.69,26.06 8.69,7.85 10.13,6.4 R28.P$2
  Bottom 0.152: v9.07,26.9 9.83,27.66 9.83,35.74 5.11,40.46 5.11,45.72 Q7.1
N$17  (via drill 0.35)
  Top 0.152: v9.22,28.04 9.22,27.66 9.68,27.2 9.68,26.59 8.99,25.91 8.99,15.16 10.13,14.02 R25.P$2
  Bottom 0.152: v9.22,28.04 9.22,30.48 8.31,31.39 8.31,36.8 4.19,40.92 4.19,46.1 5.03,46.94 5.03,53.34 Q6.1
N$18
  Bottom 0.152: TRIGATEIN.TIP 53.34,12.65 29.18,12.65 27.96,11.43 R8.P$2
N$19
  Bottom 0.152: R27.P$1 104.24,12.8 101.04,12.8 93.8,20.04 92.28,20.04 91.52,19.28 90.22,19.28 BUT1.K
N$20  (via drill 0.35)
  Top 0.152: v10.36,26.9 11.66,25.6 11.66,4.04 R29.P$2
  Bottom 0.152: v10.36,26.9 10.36,49.99 3.5,56.84 3.5,60.05 2.9,60.66 2.9,61.95 3.43,62.48 4.19,62.48 5.03,61.65 5.03,59.74 Q5.1
N$31
  Bottom 0.152: BUT.K 90.14,44.58 89.15,44.58 85.27,40.69 47.09,40.69 44.5,38.1 R15.P$1
N$32
  Bottom 0.152: 47.82,52.84 44.5,49.53 IC1.2 | 47.82,52.84 50.79,55.82 | 50.79,55.82 50.83,55.85 55.85,55.85 C6.1 | R16.P$1 44.5,65.99 44.5,63.7 50.75,57.45 50.75,55.85 50.79,55.82 | 47.82,52.84 53.11,47.55 53.11,45.26 54.03,44.35 72.54,44.35 73.46,45.26 73.46,45.72 78.49,50.75 82.53,50.75 R17.P$2
N$33
  Top 0.152: IC1.1 42.94,50.56 | 42.94,50.56 42.98,50.6 51.97,50.6 57.23,55.85 63.48,55.85 C6.2 | 42.94,50.56 39.4,54.1 39.4,58.37 R18.P$1
N$34
  Top 0.152: D3.A 31.77,59.74 33.07,59.74 R18.P$2 44.42,71.09 44.42,73.61 R16.P$2
N$74
  Bottom 0.152: TRIGOUT.TIP 53.34,71.78 42.82,71.78 38.41,67.36 31.77,67.36 D3.C
RST  (via drill 0.35)
  Top 0.152: 30.25,69.88 32.84,69.88 33.91,70.94 38.25,70.94 39.32,69.88 ISP1.5 | 30.25,69.88 29.26,69.88 ISP2.5 | v29.64,21.64 33.07,21.64 U1.1 50.6,39.17 50.6,46.18 49.45,47.32 38.86,47.32 30.25,55.93 30.25,69.88
  Bottom 0.152: v29.64,21.64 21.64,21.64 U2.1
SCK
  Bottom 0.152: U1.19 71.32,45.72 70.26,44.65 54.18,44.65 53.57,45.26 53.57,52.2 56.84,55.47 56.84,56.31 53.87,59.28 52.88,59.28 52.27,59.89 52.27,69.27 54.41,71.4 54.41,72.31 53.8,72.92 45.41,72.92 44.58,72.08 40.54,72.08 39.4,70.94 37.95,70.94 36.88,69.88 ISP1.3
SCK2
  Bottom 0.152: ISP2.3 26.67,53.11 22.02,48.46 21.57,48.46 17.6,44.5 14.02,44.5 U2.19
SCL  (via drill 0.35)
  Top 0.152: v17.07,21.64 14.02,21.64 U2.28 | v33.3,25.6 42.06,34.37 42.44,34.37 49.53,41.45 U1.28
  Bottom 0.152: v17.07,21.64 17.6,21.64 21.57,25.6 v33.3,25.6
SDA  (via drill 0.35)
  Top 0.152: v19.74,30.25 21.57,30.25 25.83,34.52 25.83,35.97 26.67,36.8 27.05,36.8 v35.66,45.41 | v39.17,47.93 49.84,47.93 52.05,45.72 U1.27
  Bottom 0.152: v19.74,30.25 14.02,24.54 14.02,24.16 U2.27 | v35.66,45.41 35.66,46.1 37.49,47.93 v39.17,47.93
T1
  Top 0.152: 84.01,27.7 85.04,26.67 R11.P$2 | 84.01,27.7 74.98,36.73 74.98,38.1 U1.11 | 84.01,27.7 69.95,13.64 67.36,13.64 MODESW2.3
T2
  Bottom 0.152: U1.6 62.26,38.1 62.26,34.21 73.61,22.86 R12.P$2 73.53,22.86 72.47,21.79 72.47,11.35 67.36,6.25 67.36,4.19 MODESW2.1
T3
  Top 0.152: U1.25 57.15,46.33 69.8,58.98 69.8,62.18 R2.P$2
  Bottom 0.152: R2.P$2 78.33,70.71 78.72,70.71 MODESW1.3
T4
  Bottom 0.152: 62.18,61.04 62.18,62.18 R3.P$2 | 62.18,61.04 62.18,58.98 58.52,55.32 58.52,50.52 54.63,46.63 54.63,45.72 U1.26 | 62.18,61.04 70.33,61.04 70.56,61.27 78.72,61.27 MODESW1.1
T5
  Top 0.152: U1.23 63.25,45.72 65.3,47.78 83.36,47.78 86.64,44.5 86.64,38.94 90.07,35.51 91.9,35.51 93.31,34.1 | 93.31,34.1 99.06,28.35 R5.P$2 | 93.31,34.1 90.22,31.01 90.22,30.1 85.57,25.45 85.5,25.45 78.49,18.44 78.49,13.64 MODESW3.3
T6
  Top 0.152: U1.24 60.73,45.72 63.09,48.08 85.42,48.08 89.15,44.35 89.15,41.68 91.67,39.17 91.67,39.01 95.17,35.51 101.65,35.51 R6.P$2 105.31,31.85 105.31,23.62 94.64,12.95 91.9,12.95 83.13,4.19 78.49,4.19 MODESW3.1
T7
  Bottom 0.152: U1.12 77.5,38.1 77.5,30.4 85.04,22.86 R21.P$2 85.11,22.86 85.11,15.09 87.94,12.27 87.94,6.4 PROGSW.1
T8
  Top 0.152: R20.P$2 97.46,9.83 97.46,6.4 PROGSW.3
  Bottom 0.152: U1.13 80.01,29.87 89.53,20.34 95.25,20.34 101.58,14.02 R20.P$2
TRIG
  Top 0.152: U1.4 52.43,33.38 52.43,25.07 48.31,20.95 48.31,17.83 V1.3
TRIGO  (via drill 0.35)
  Top 0.152: v45.8,46.71 45.8,41.15 41.91,37.26 R19.P$2
  Bottom 0.152: BUT.A 90.14,39.24 89.15,39.24 88.01,40.39 84.89,40.39 82.6,38.1 U1.14 81.99,38.1 80.62,39.47 47.55,39.47 43.66,35.59 41.91,35.59 R19.P$2 | v45.8,46.71 46.94,47.85 46.94,49.53 IC1.3

## Text on the board
bNames: From the Workshop of Telescopes | @R2Project. 2017 / Designed by Andy C / Hardware inspired by GMSN! ADSR / Display based on SparkFun / OpenSegment Serial Display | Mineral Fire | Board_v0.2